# Altium PCB board.PcbDoc
Units mil, origin at the board's own origin, x right, y up, seen from the top; angles counter-clockwise.
Board outline 2086.61 x 3346.46 mil, 2 copper layers (Top Layer, Bottom Layer); 5 components, 22 nets, 98 pads, 29 vias.
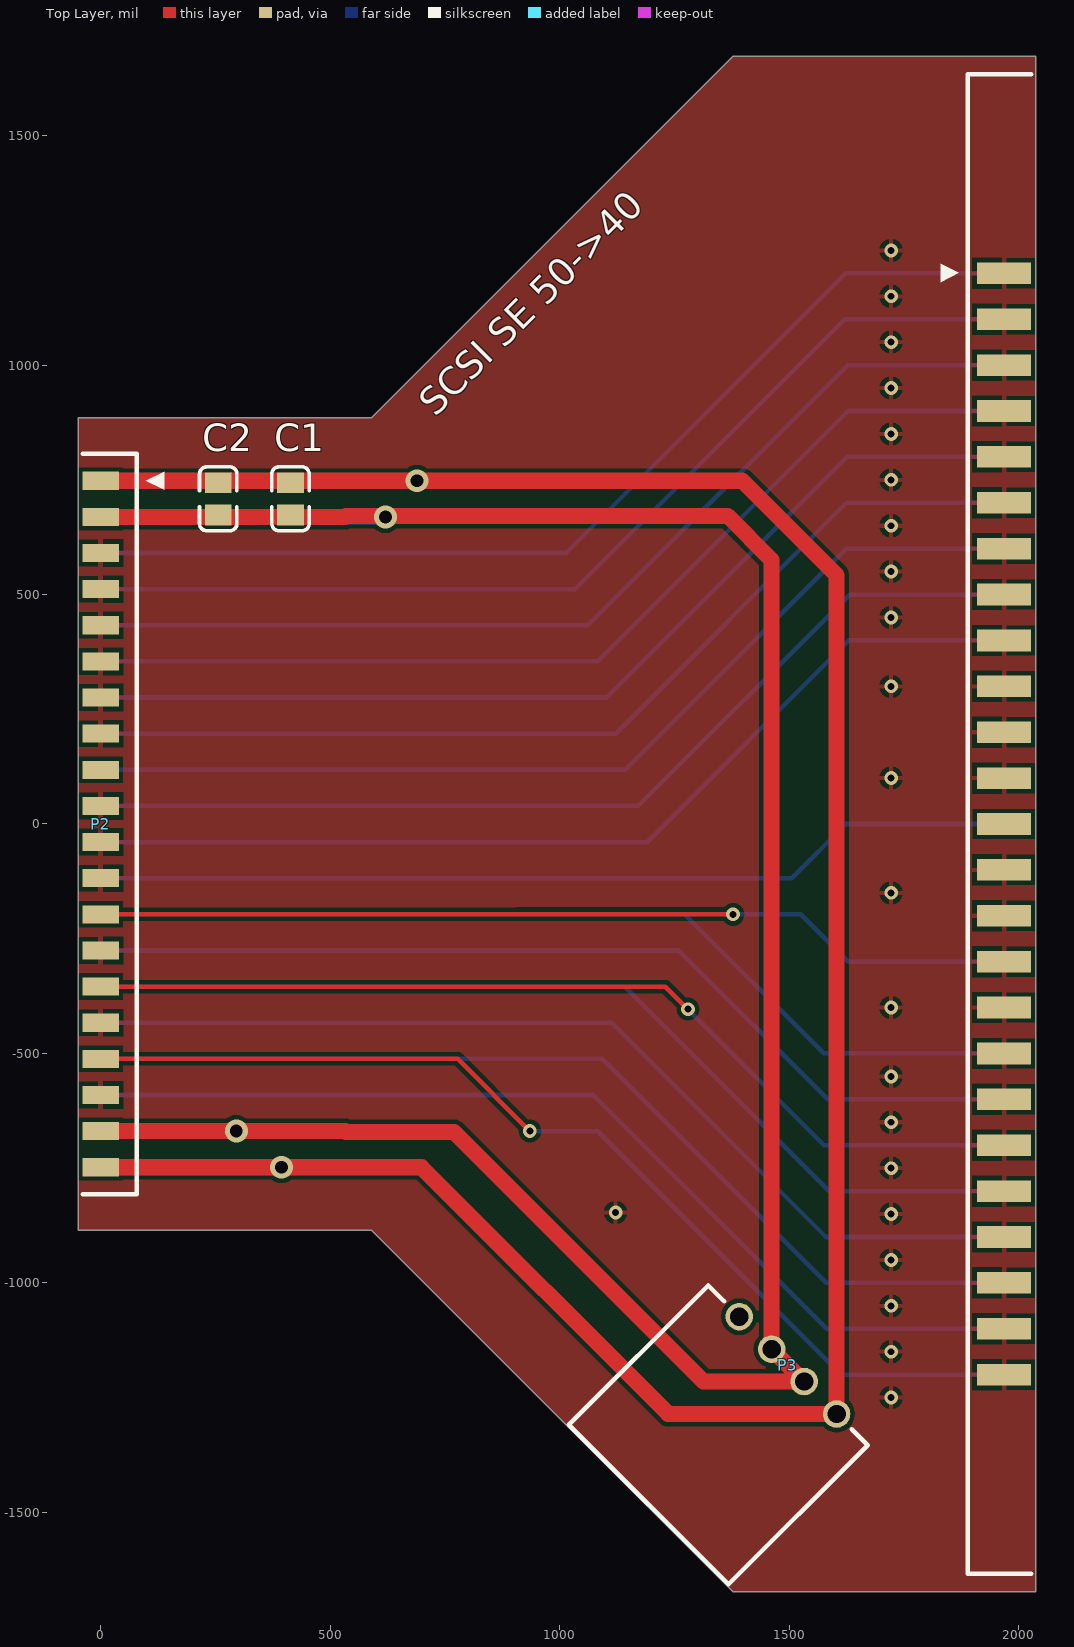
[diagram p0: Top Layer view]
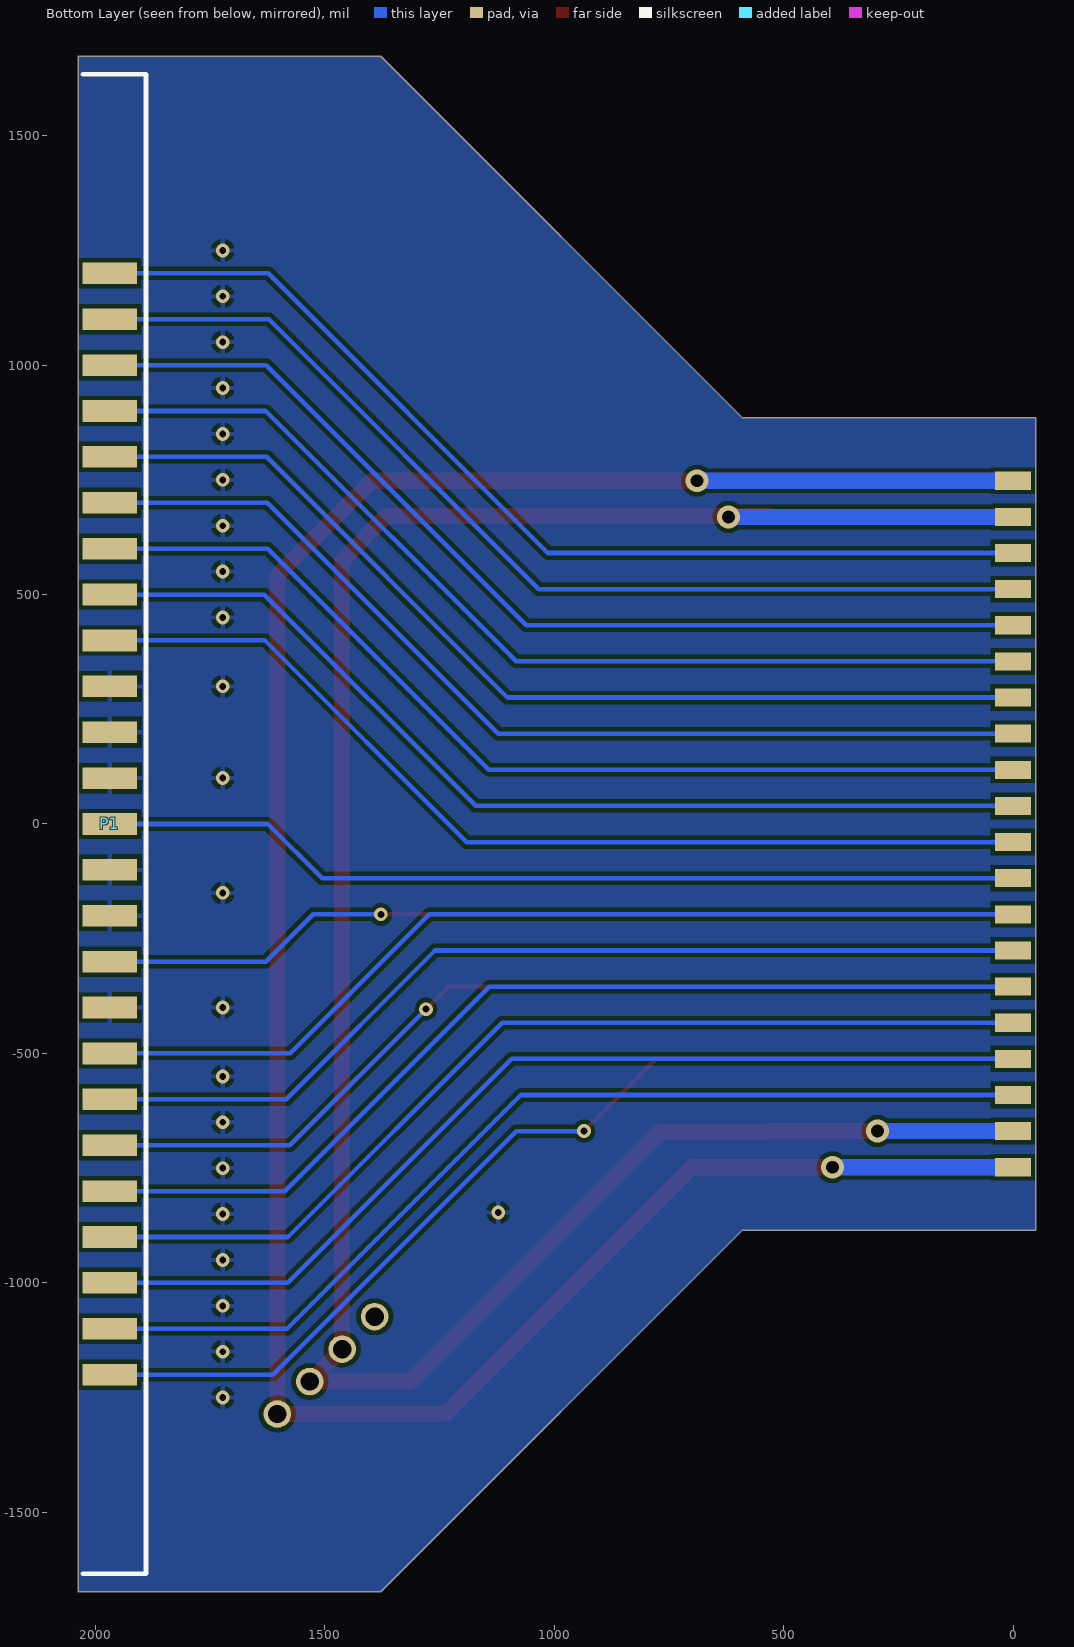
[diagram p1: Bottom Layer view, seen from below]

## Layer stack, top to bottom
Top Solder: solder mask 0.4, Solder Resist, Dk 3.5
Top Layer: signal copper 1.4
Dielectric 1: dielectric 12.6, FR-4, Dk 4.8
Bottom Layer: signal copper 1.4
Bottom Solder: solder mask 0.4, Solder Resist, Dk 3.5

## Board outline
-49.21,-885.83 590.55,-885.83 1377.95,-1673.23 2037.4,-1673.23 2037.4,1673.23 1377.95,1673.23 590.55,885.83 -49.21,885.83

## Design rules (kind name [scope] priority, off if disabled: settings)
Clearance [All] p1: gap=10
PolygonConnect [All] p1: connectstyle=Relief reliefconductorwidth=10 reliefentries=4 polygonreliefangle="90 Angle" airgapwidth=10
RoutingVias [All] p1: holewidth=28 width=50 viastyle="Through Hole" minholewidth=28 minwidth=50 maxholewidth=28 maxwidth=50
SolderMaskExpansion [All] p1: expansion=4
Width [All] p1: maxlimit=50 minlimit=10 preferedwidth=10
29 further rules are at their usual default settings.

## Components (designator, comment, footprint, x,y, rotation, side; value= is the part's Value field where it differs from the comment)
C1 "10uF (106) 10% 25V" LC-0805_C 413.39,708.66 r90 top
C2 "100nF(104) 10% 50V" LC-0805_C 255.91,708.66 r90 top
P1 "Header 25X2-F" DC2-25*2H/2.54 1968.5,0 r270 bottom
P2 "Header 20X2-F" "Header 20*2H/2.0" 0,0 r270 top locked
P3 "FL-S4P-M" FL-S4P-M 1358.27,-1318.9 r315 top

## Footprints (in the part's own frame and the unit in brackets; to place one, negate y for a bottom-side part, rotate by r counter-clockwise, add the part's x,y. Pads: shape width x height; smd on the part's side, far side on the other; paste and mask are expansions set on the pad)
DC2-25*2H/2.54 [mm]
  rect 1.2x3 smd far side: 1(-30.48,0) 3(-27.94,0) 5(-25.4,0) 7(-22.86,0) 9(-20.32,0) 11(-17.78,0) 13(-15.24,0) 15(-12.7,0) 17(-10.16,0) 19(-7.62,0) 21(-5.08,0) 23(-2.54,0) 25(0,0) 27(2.54,0) 29(5.08,0) 31(7.62,0) 33(10.16,0) 35(12.7,0) 37(15.24,0) 39(17.78,0) 41(20.32,0) 43(22.86,0) 45(25.4,0) 47(27.94,0) 49(30.48,0)
  rect 1.2x3 smd: 2(-30.48,0) 4(-27.94,0) 6(-25.4,0) 8(-22.86,0) 10(-20.32,0) 12(-17.78,0) 14(-15.24,0) 16(-12.7,0) 18(-10.16,0) 20(-7.62,0) 22(-5.08,0) 24(-2.54,0) 26(0,0) 28(2.54,0) 30(5.08,0) 32(7.62,0) 34(10.16,0) 36(12.7,0) 38(15.24,0) 40(17.78,0) 42(20.32,0) 44(22.86,0) 46(25.4,0) 48(27.94,0) 50(30.48,0)
  silkscreen extent -41.5,-1.5 41.5,2
FL-S4P-M [mil]
  round 60 hole 40: 1(-150,196.85) 2(-50,196.85) 3(50,196.85) 4(150,196.85)
  silkscreen extent -246,-232 246,197
"Header 20*2H/2.0" [mm]
  rect 1x2 smd: 1(-19,0) 3(-17,0) 5(-15,0) 7(-13,0) 9(-11,0) 11(-9,0) 13(-7,0) 15(-5,0) 17(-3,0) 19(-1,0) 21(1,0) 23(3,0) 25(5,0) 27(7,0) 29(9,0) 31(11,0) 33(13,0) 35(15,0) 37(17,0) 39(19,0)
  rect 1x2 smd far side: 2(-19,0) 4(-17,0) 6(-15,0) 8(-13,0) 10(-11,0) 12(-9,0) 14(-7,0) 16(-5,0) 18(-3,0) 20(-1,0) 22(1,0) 24(3,0) 26(5,0) 28(7,0) 30(9,0) 32(11,0) 34(13,0) 36(15,0) 38(17,0) 40(19,0)
  silkscreen extent -20.5,-1 20.5,3.5
LC-0805_C [mm]
  rect 1.16x1.47 smd: 1(-0.89,0) 2(0.89,0)
  silkscreen extent -1.77,-1.04 1.77,1.04, body extent -1,-0.62 1,0.63, height 0.77

## Part data
C1: library part "0805 10uF (106) 10% 25V", "贴片电容"
C2: library part "0805 100nF(104) 10% 50V", "贴片电容"
P1: library part "Header 25X2H", "Header, 25-Pin, Dual row, Right Angle"
P2: library part "Header 20X2H", "Header, 20-Pin, Dual row, Right Angle"
P3: "Small 4Pin Power Connector(Male)"

## Via types
v1: diameter 30, hole 15, Top Layer to Bottom Layer, tented both sides, 25 vias
v2: diameter 50, hole 28, Top Layer to Bottom Layer, tented both sides, 4 vias

## Nets (pads, with @x,y where several pads share a name; then routed paths per layer and width w, separated by ;. In a path a pad name is that pad's centre, name@x,y a point inside that pad or via, vN(x,y) a via of type N, cw(c..) or ccw(c..) an arc to the next point about the centre after c; other vN are vias at no path point)
5VSUP: C1.2 C2.2 P2.1 P2.2 P2.39 P2.40 P3.4 | length 6425.7
  Top Layer w35: P2.39 v2(393.7,-748.03) 698.82,-748.03 1236.56,-1285.77 P3.4 1603.53,542.14 1397.64,748.03 v2(688.98,748.03) P2.1
  Bottom Layer w35: P2.40 v2(393.7,-748.03) ; P2.2 v2(688.98,748.03)
#ACK: P1.38 P2.28 | length 2102.9
  Bottom Layer w10: P2.28 1259.84,-275.59 1584.25,-600 P1.38
#ATN: P1.32 P2.25 | length 2011.2
  Top Layer w10: P2.25 905.51,-196.85 v1(1377.95,-196.85)
  Bottom Layer w10: v1(1377.95,-196.85) 1525.59,-196.85 1628.74,-300 P1.32
#BSY: P1.36 P2.26 | length 2094.1
  Bottom Layer w10: P2.26 1272.17,-196.85 1575.32,-500 P1.36
#C/D: P1.46 P2.34 | length 2170.7
  Bottom Layer w10: P2.34 1092.52,-511.81 1580.71,-1000 P1.46
#DB0: P1.2 P2.6 | length 2220.9
  Bottom Layer w10: P2.6 1013.78,590.55 1623.23,1200 P1.2
#DB1: P1.4 P2.8 | length 2212.1
  Bottom Layer w10: P2.8 1033.46,511.81 1621.65,1100 P1.4
#DB2: P1.6 P2.10 | length 2203.3
  Bottom Layer w10: P2.10 1061.02,433.07 1627.95,1000 P1.6
#DB3: P1.8 P2.12 | length 2194.5
  Bottom Layer w10: P2.12 1082.68,354.33 1628.35,900 P1.8
#DB4: P1.10 P2.14 | length 2185.7
  Bottom Layer w10: P2.14 1102.36,275.59 1626.77,800 P1.10
#DB5: P1.12 P2.16 | length 2176.9
  Bottom Layer w10: P2.16 1122.05,196.85 1625.2,700 P1.12
#DB6: P1.14 P2.18 | length 2168.1
  Bottom Layer w10: P2.18 1142.52,118.11 1624.41,600 P1.14
#DB7: P1.16 P2.20 | length 2159.3
  Bottom Layer w10: P2.20 1171.26,39.37 1631.89,500 P1.16
#I/O: P1.50 P2.33 | length 2253.6
  Top Layer w10: P2.33 777.56,-511.81 v1(935.04,-669.29)
  Bottom Layer w10: v1(935.04,-669.29) 1082.68,-669.29 1613.39,-1200 P1.50
#MSG: P1.42 P2.30 | length 2153.1
  Bottom Layer w10: P2.30 1141.73,-354.33 1587.4,-800 P1.42
#PAIRTY: P1.18 P2.22 | length 2150.5
  Bottom Layer w10: P2.22 1190.94,-39.37 1630.31,400 P1.18
#REQ: P1.48 P2.36 | length 2179.5
  Bottom Layer w10: P2.36 1072.84,-590.55 1582.28,-1100 P1.48
#RST: P1.40 P2.29 | length 2111.7
  Top Layer w10: P2.29 1230.31,-354.33 v1(1279.53,-403.54)
  Bottom Layer w10: v1(1279.53,-403.54) 1575.98,-700 P1.40
#SEL: P1.44 P2.32 | length 2161.9
  Bottom Layer w10: P2.32 1113.39,-433.07 1580.31,-900 P1.44
GND: P1.1 P1.3 P1.5 P1.7 P1.9 P1.11 P1.13 P1.15 P1.17 P1.19 P1.20 P1.21 P1.22 P1.23 P1.24 P1.27 P1.28 P1.29 P1.30 P1.31 P1.33 P1.34 P1.35 P1.37 P1.39 P1.41 P1.43 P1.45 P1.47 P1.49 P2.5 P2.7 P2.9 P2.11 P2.13 P2.15 P2.19 P2.21 P2.23 P2.27 P2.31 P2.35
  other v1: 1722.44,-1250 1722.44,-1150 1722.44,-1050 1722.44,-950 1722.44,-850 1122.05,-846.46 1722.44,-750 1722.44,-650 1722.44,-550 1722.44,-400 1722.44,-150 1722.44,100 1722.44,300 1722.44,450 1722.44,550 1722.44,650 1722.44,750 1722.44,850 1722.44,950 1722.44,1050 1722.44,1150 1722.44,1250
MGND: C1.1 C2.1 P2.3 P2.4 P2.37 P2.38 P3.2 P3.3 | length 6292
  Top Layer w35: P2.37 v2(295.28,-669.29) 531.86,-669.29 533.99,-671.42 769.85,-671.42 1313.48,-1215.06 P3.3 P3.2 1462.11,575.29 1365.98,671.42 533.99,671.42 531.86,669.29 P2.3
  Bottom Layer w35: P2.4 v2(620.08,669.29) ; P2.38 v2(295.28,-669.29) P2.38
"TERM PWR": P1.26 P2.24 | length 2017.4
  Bottom Layer w10: P2.24 1505.91,-118.11 1624.02,0 P1.26
pads on no net: P1.25 P2.17 P3.1

## Polygon pours and split planes (outlines as drawn)
GND on Top Layer "Bottom Layer-No Net" (solid, remove dead copper, pour order 4): 2037.4,1673.23 1377.95,1673.23 590.55,885.83 -49.21,885.83 -49.21,-885.83 590.55,-885.83 1377.95,-1673.23 2037.4,-1673.23
GND on Bottom Layer "Bottom Layer-No Net" (solid, remove dead copper, pour order 4): 2037.4,1673.23 1377.95,1673.23 590.55,885.83 -49.21,885.83 -49.21,-885.83 590.55,-885.83 1377.95,-1673.23 2037.4,-1673.23

## Silkscreen, mask and mechanical layers (free items; w line width, h text height)
Top Overlay:
  text "SCSI SE 50->40" at 728.35,885.83 h60 r45
Mechanical 1:
  the board outline again, w10